# EAGLE board MAAV_Vehicle_13v1 (EAGLE 6.2)
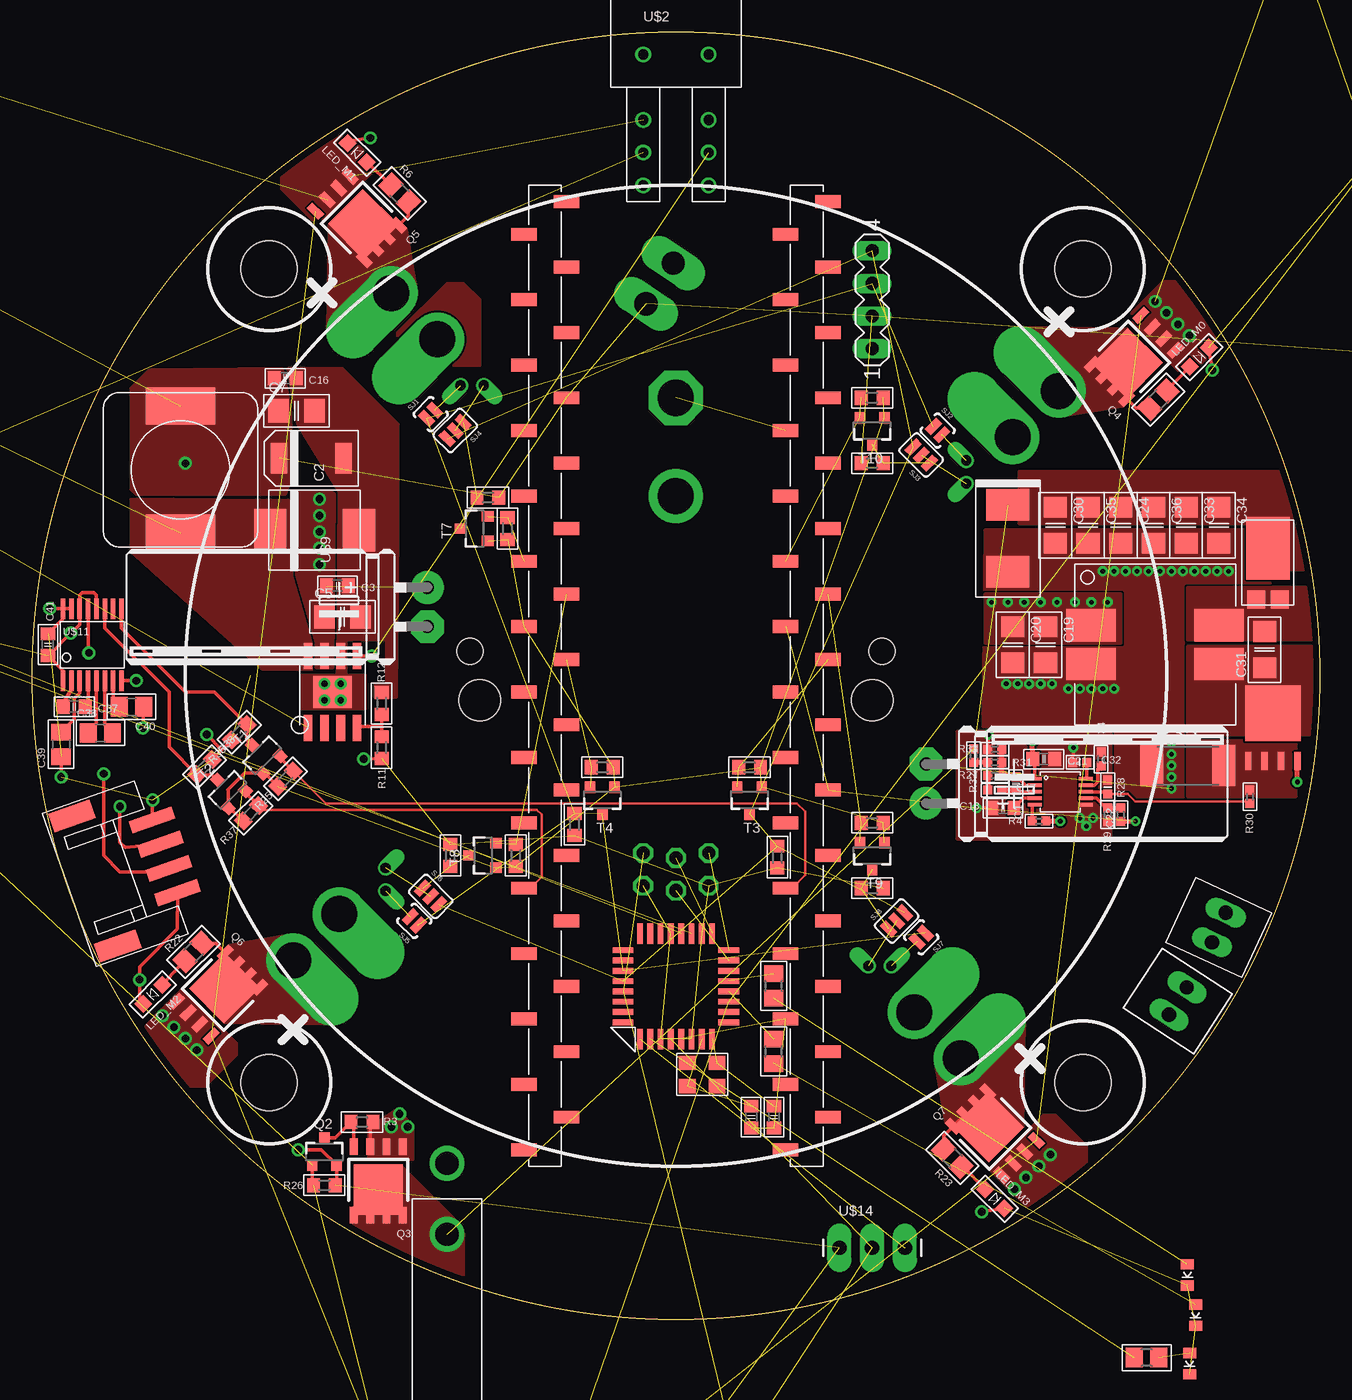
[diagram p0: board, top side]
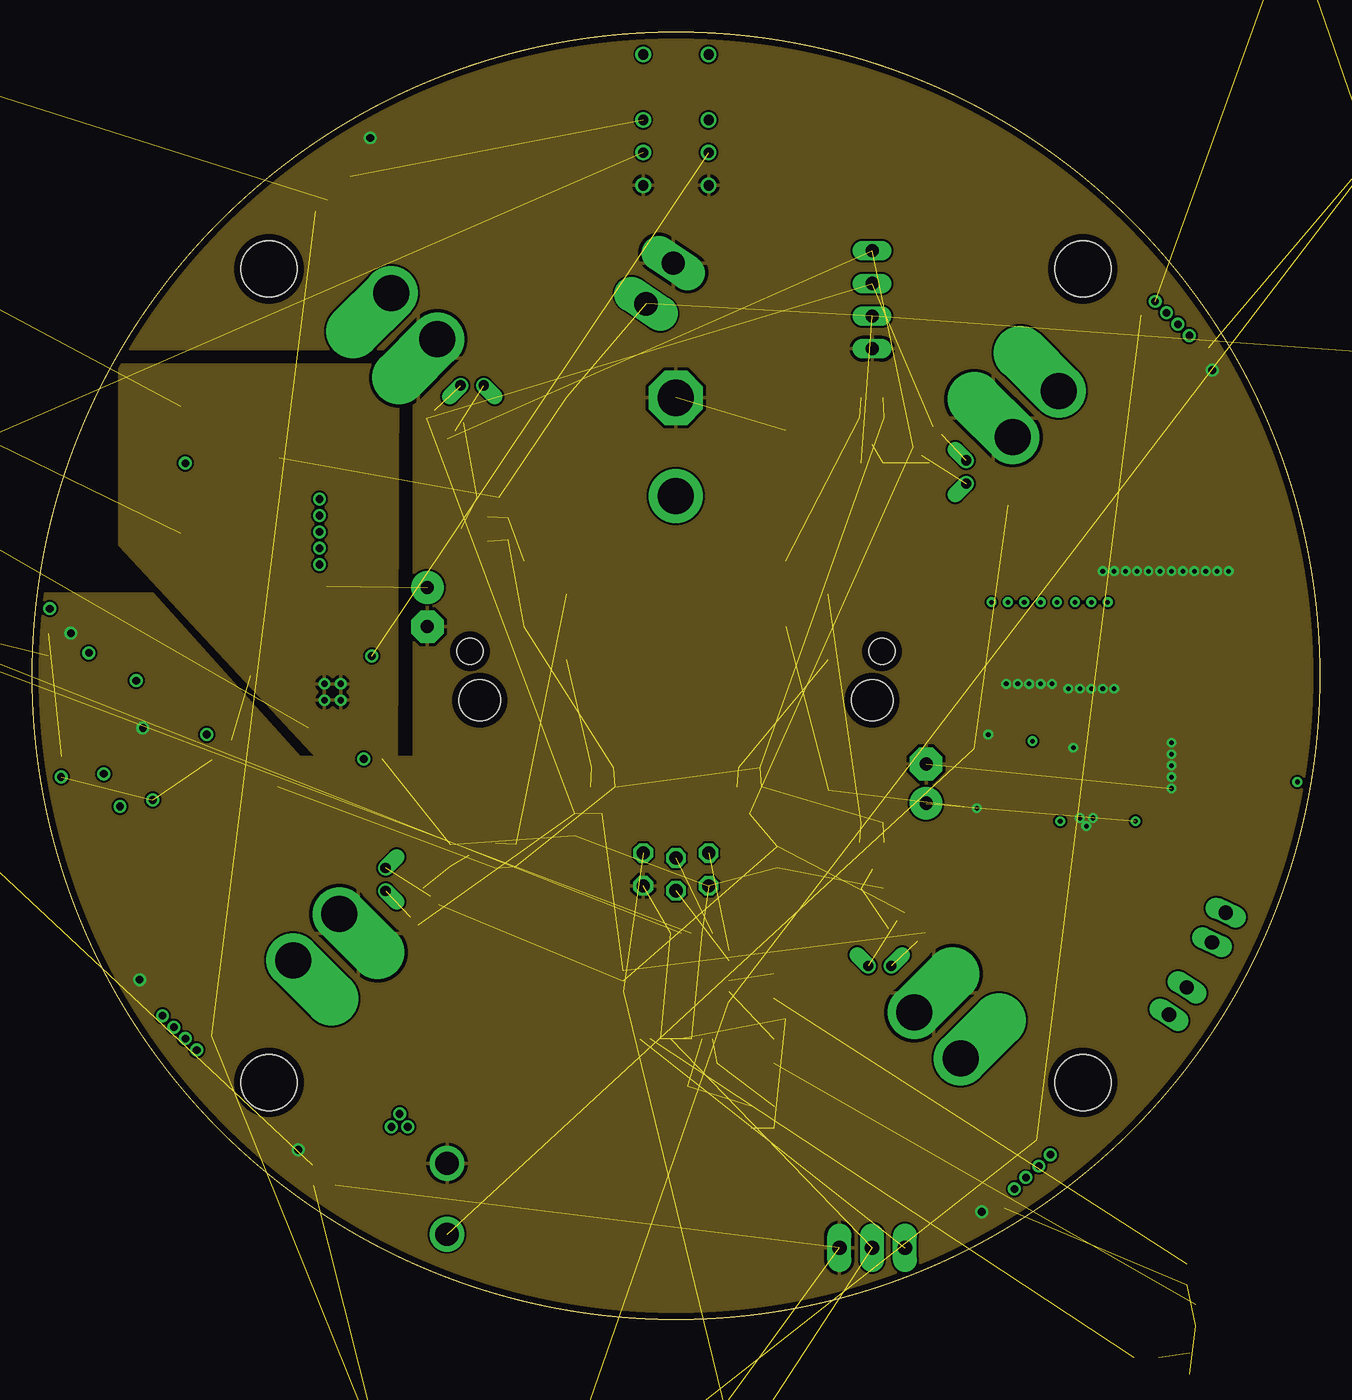
[diagram p1: board, inner layer Route2]
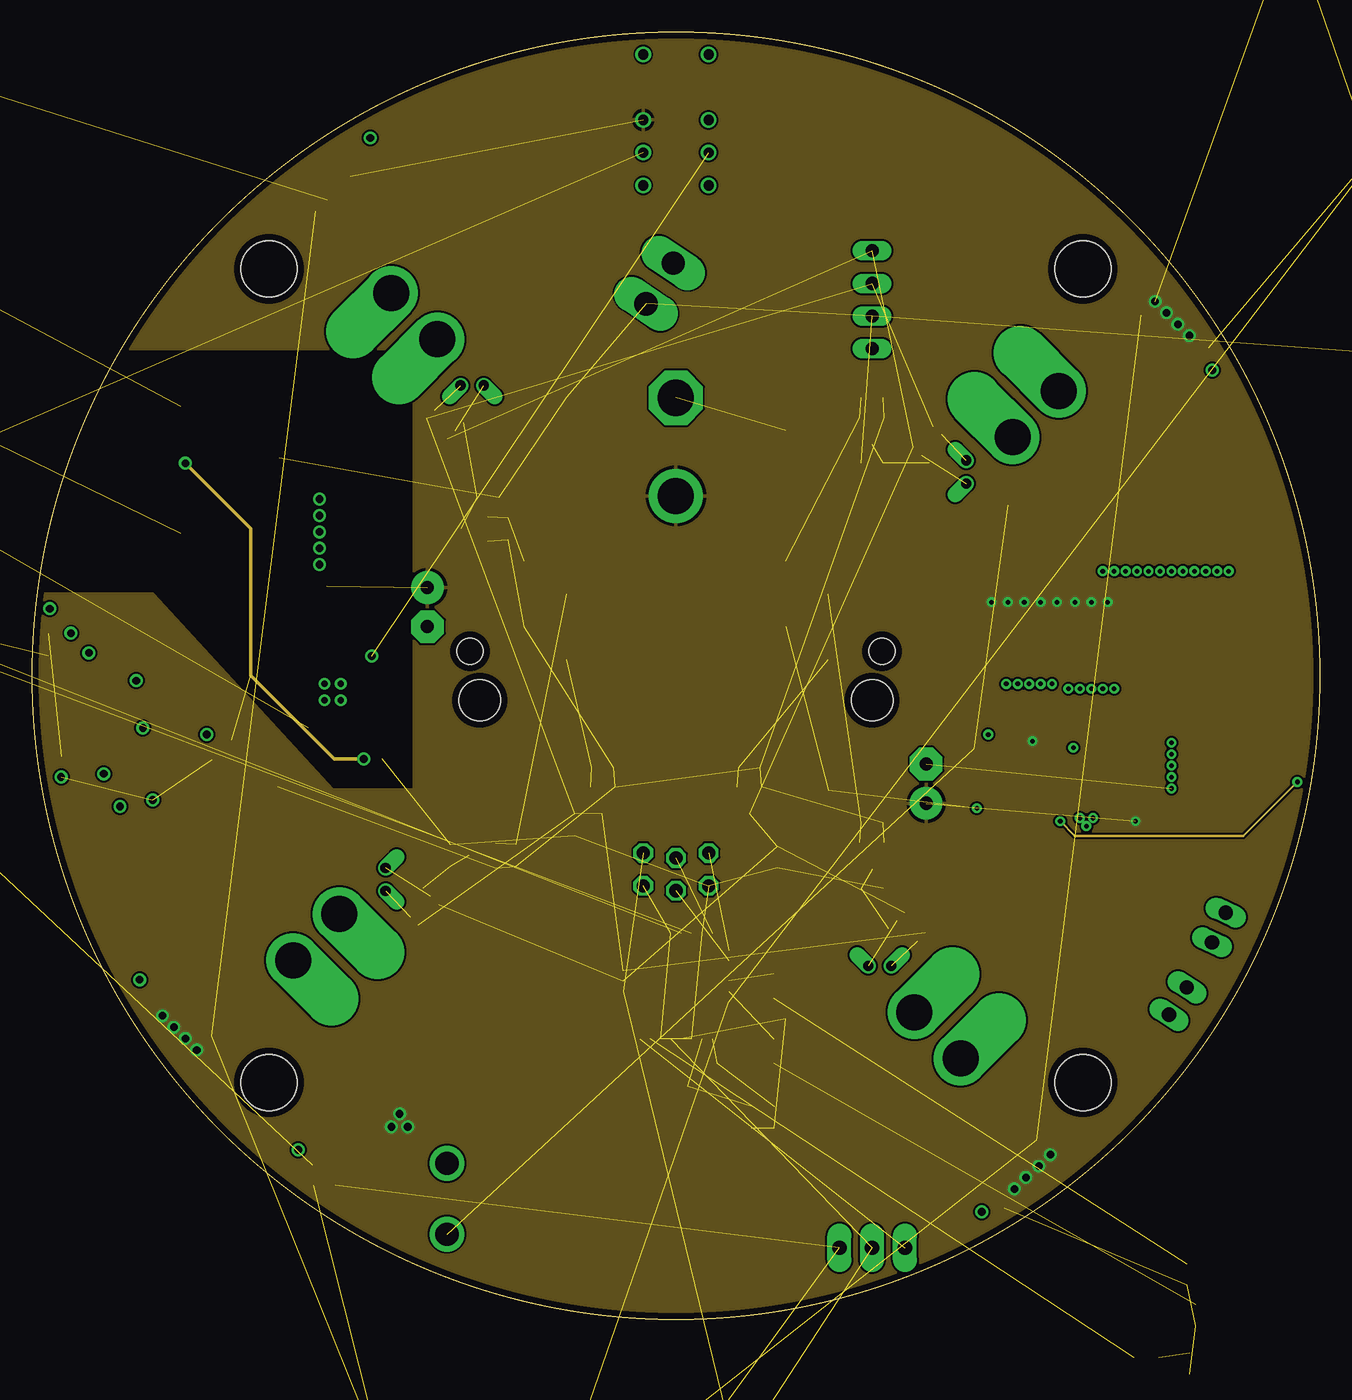
[diagram p2: board, inner layer Route15]
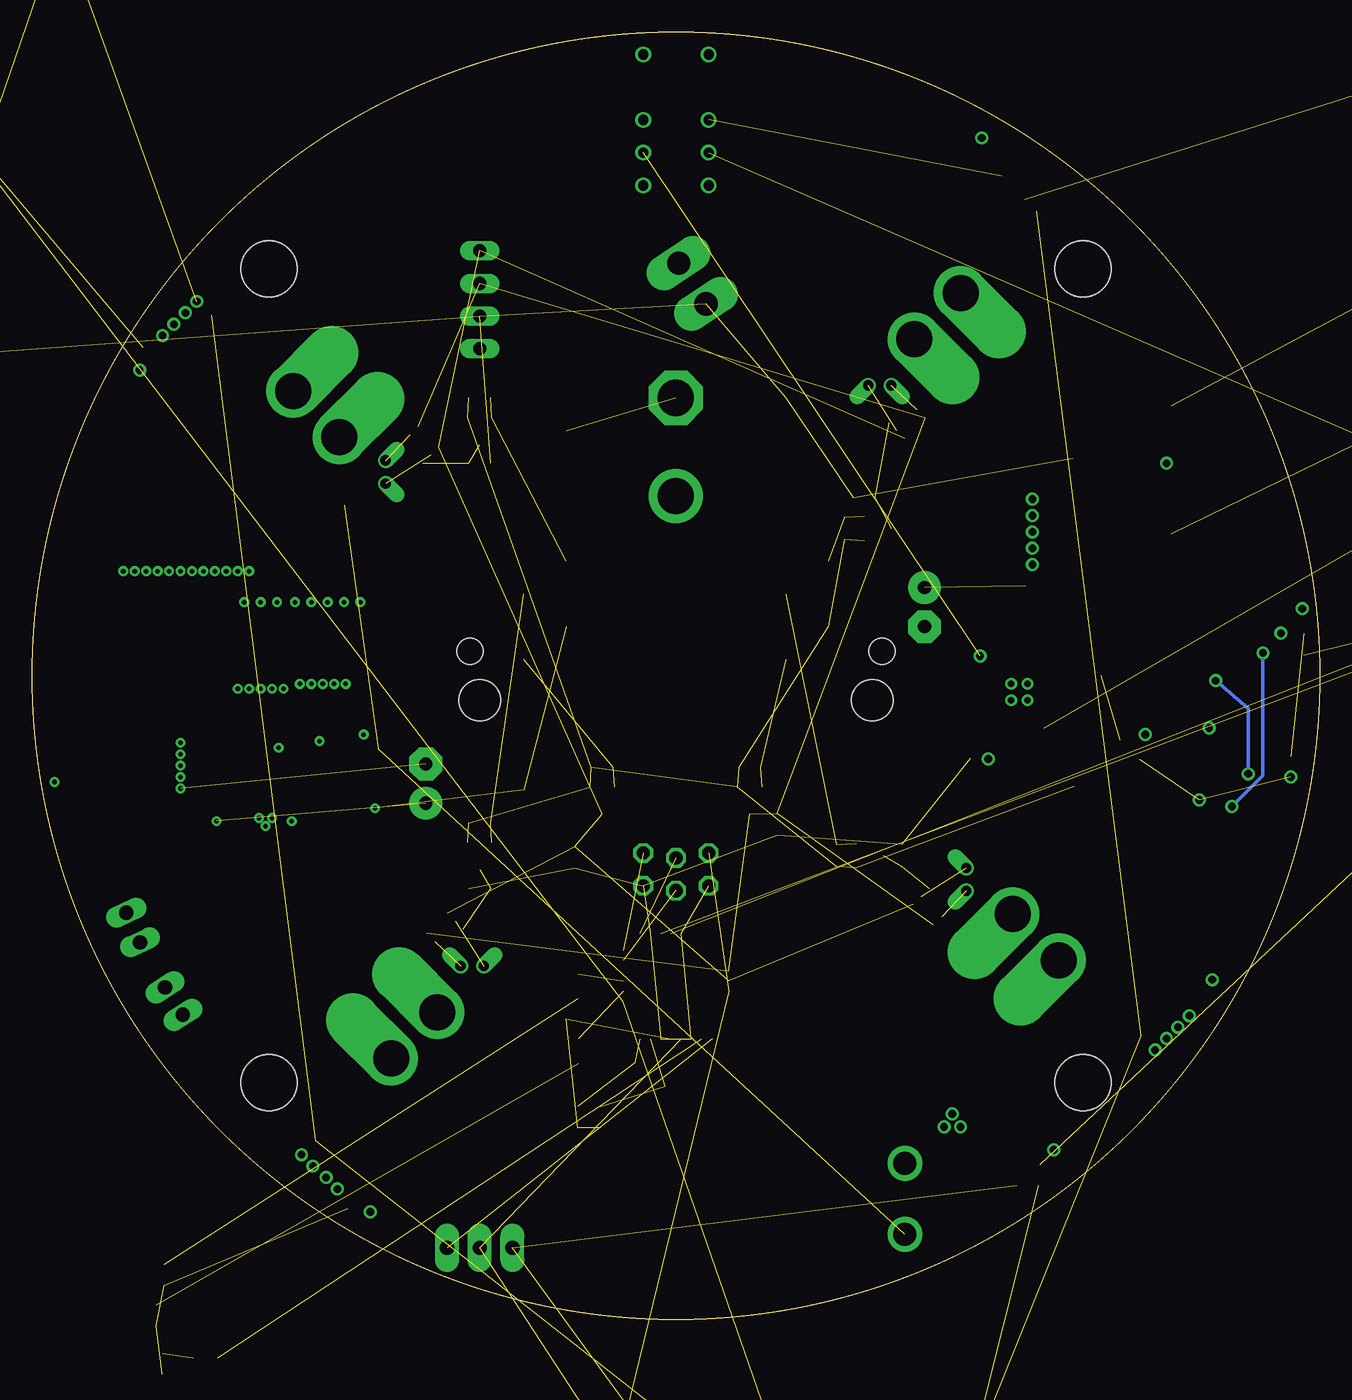
[diagram p3: board, bottom side, seen from below]

Size 100 x 100 mm. Coordinates in mm from the lower left corner, seen from the top.
Outline: circle at 50,50 radius 50
Copper layers (1+2*15+16): Top 0.0178mm / dielectric 12mil / Route2 0.0356mm / dielectric 28mil / Route15 0.0356mm / dielectric 12mil / Bottom 0.0178mm
Design rules: minimum track width 6mil, minimum drill 8mil, track to track 6mil, track to pad 6mil, pad to pad 6mil, via to via 6mil, smd to smd 6mil, copper to edge 20mil, drill to drill 16mil, minimum pad ring 8mil, minimum via ring 8mil, stop-mask expansion 3mil, vias tented up to drill 0mil, thermal gap 10mil
Holes 4.37 mm at 81.6,81.6 81.6,18.4 18.4,18.4 18.4,81.6

## Footprints (pad centres in the part's own frame; a part is rotated, then mirrored left to right if it is on the bottom)
C0402 = smd 0.7 x 0.7: 1 -0.533,0; 2 0.533,0
C_2917_POL = smd 1.3 x 2.4: A -2.5,0; C 2.5,0
C0603 = smd 1 x 1.1: 1 -0.85,0; 2 0.85,0
C1206 = smd 1.6 x 1.8: 1 -1.4,0; 2 1.4,0
C2917 = smd 2.45 x 3.35: + -2.6,0; - 2.6,0
EH22-9 = drill 1.016 pad 2.54: + 0,-1.524 | drill 1.016 pad 2.54 octagon: - 0,1.524
C0805 = smd 1.3 x 1.5: 1 -0.95,0; 2 0.95,0
PDS760 = smd 1.4 x 1.39: A1 -3.982,0.92; A2 -3.982,-0.92 | smd 4.86 x 3.36: C 0,0
PINTO_SMD = smd 2 x 1: P1 8.509,-36.83; P2 -11.811,-36.83; P3 11.811,-34.29; P4 -8.509,-34.29; P5 8.509,-31.75; P6 -11.811,-31.75; P7 11.811,-29.21; P8 -8.509,-29.21; P9 8.509,-26.67; P10 -11.811,-26.67; P11 11.811,-24.13; P12 -8.509,-24.13; P13 8.509,-21.59; P14 -11.811,-21.59; P15 11.811,-19.05; P16 -8.509,-19.05; P17 8.509,-16.51; P18 -11.811,-16.51; P19 11.811,-13.97; P20 -8.509,-13.97; P21 8.509,-11.43; P22 -11.811,-11.43; P23 11.811,-8.89; P24 -8.509,-8.89; P25 8.509,-6.35; P26 -11.811,-6.35; P27 11.811,-3.81; P28 -8.509,-3.81; P29 8.509,-1.27; P30 -11.811,-1.27; P31 11.811,1.27; P32 -8.509,1.27; P33 8.509,3.81; P34 -11.811,3.81; P35 11.811,6.35; P36 -8.509,6.35; P37 8.509,8.89; P38 -11.811,8.89; P39 11.811,11.43; P40 -8.509,11.43; P41 8.509,13.97; P42 -11.811,13.97; P43 11.811,16.51; P44 -8.509,16.51; P45 8.509,19.05; P46 -11.811,19.05; P47 11.811,21.59; P48 -8.509,21.59; P49 8.509,24.13; P50 -11.811,24.13; P51 11.811,26.67; P52 -8.509,26.67; P53 8.509,29.21; P54 -11.811,29.21; P55 11.811,31.75; P56 -8.509,31.75; P57 8.509,34.29; P58 -11.811,34.29; P59 11.811,36.83; P60 -8.509,36.83
MA03-2 = drill 1.016 octagon: P$1 -2.54,-1.46; P$2 0,-1.079; P$3 2.54,-1.46; P$4 2.54,1.079; P$5 0,1.46; P$6 -2.54,1.079
MA-04-SMD = smd 3.5 x 1: 1 2.875,3; 2 2.875,1; 3 2.875,-1; 4 2.875,-3 | smd 3.4 x 1.5: P$1 -2.875,-5.35; P$2 -2.875,5.35
POWER_CONN = drill 1.8: P1 2.75,0; P2 -2.75,0
DRQ125 = smd 3.85 x 2.5: 1 -4.975,1.5; 2 -4.975,-1.5; 3 4.975,-1.5; 4 4.975,1.5
CHIPLED_0603 = smd 0.8 x 1: A -0.825,0; C 0.825,0
CHIPLED_0805 = smd 1 x 1: A 0,-1.05; C 0,1.05
4-SMD_DFN = smd 1.3 x 1.1: GND1 1.15,-0.9; GND2 -1.15,0.9; X1 -1.15,-0.9; X2 1.15,0.9
SOT23-3 = smd 0.8 x 0.9: 1 -0.95,-1; 2 0.95,-1; 3 0,1.1
SO-8_POWER-PAK = smd 0.61 x 1.27: D1 -1.905,2.67; D2 -0.635,2.67; D3 0.635,2.67; D4 1.905,2.67; G 1.905,-2.67; S1 -1.905,-2.67; S2 -0.635,-2.67; S3 0.635,-2.67 | smd 3.81 x 3.91: D5 0,0.69
POWERFLAT-8 = smd 0.495 x 1.4: P$1 -1.905,-1.55; P$2 -0.635,-1.55; P$3 0.635,-1.55; P$4 1.905,-1.55 | smd 4.305 x 4.3: P$5 0,2.152
R0603 = smd 1 x 1.1: 1 -0.85,0; 2 0.85,0
R0402 = smd 0.7 x 0.7: 1 -0.533,0; 2 0.533,0
R0805 = smd 1.3 x 1.5: 1 -0.95,0; 2 0.95,0
R2512 = smd 1.8 x 3.2: 1 -2.8,0; 2 2.8,0
SWITCH-OFF-MOM = smd 1.45 x 1: P$1 2.575,0.85; P$2 2.575,-0.85; P$3 -2.575,0.85; P$4 -2.575,-0.85
SJ_2S-NO = smd 0.635 x 1.27: 1 -0.45,0; 2 0.45,0
SJ_3 = smd 0.635 x 1.27: 1 -0.889,0; 2 0,0; 3 0.889,0
MA04-1 = drill 1.016 long: 1 -3.81,0; 2 -1.27,0; 3 1.27,0; 4 3.81,0
MSOP-10 = smd 0.27 x 1.075: P$1 -1,-1.988; P$2 -0.5,-1.988; P$3 0,-1.988; P$4 0.5,-1.988; P$5 1,-1.988; P$6 1,1.988; P$7 0.5,1.988; P$8 0,1.988; P$9 -0.5,1.988; P$10 -1,1.988
TPS5450 = smd 2.032 x 0.66: P$1 -2.794,1.905; P$2 -2.794,0.635; P$3 -2.794,-0.635; P$4 -2.794,-1.905; P$5 2.794,-1.905; P$6 2.794,-0.635; P$7 2.794,0.635; P$8 2.794,1.905 | smd 2.49 x 2.99: P$9 0,0 | drill 0.5: P$10 0.635,0.635; P$11 0.635,-0.635; P$12 -0.635,-0.635; P$13 -0.635,0.635
32-TQFP = smd 1.6 x 0.45: P$1 -4.1,2.8; P$2 -4.1,2; P$3 -4.1,1.2; P$4 -4.1,0.4; P$5 -4.1,-0.4; P$6 -4.1,-1.2; P$7 -4.1,-2; P$8 -4.1,-2.8; P$17 4.1,-2.8; P$18 4.1,-2; P$19 4.1,-1.2; P$20 4.1,-0.4; P$21 4.1,0.4; P$22 4.1,1.2; P$23 4.1,2; P$24 4.1,2.8 | smd 0.45 x 1.6: P$9 -2.8,-4.1; P$10 -2,-4.1; P$11 -1.2,-4.1; P$12 -0.4,-4.1; P$13 0.4,-4.1; P$14 1.2,-4.1; P$15 2,-4.1; P$16 2.8,-4.1; P$25 2.8,4.1; P$26 2,4.1; P$27 1.2,4.1; P$28 0.4,4.1; P$29 -0.4,4.1; P$30 -1.2,4.1; P$31 -2,4.1; P$32 -2.8,4.1
8-SOIC = smd 2 x 0.6: P$1 -2.4,1.905; P$2 -2.4,0.635; P$3 -2.4,-0.635; P$4 -2.4,-1.905; P$5 2.4,-1.905; P$6 2.4,-0.635; P$7 2.4,0.635; P$8 2.4,1.905
CDRH127 = smd 2.9 x 5.4: P1 -4.95,0; P2 4.95,0
SWITCH_VERT_DPDT = drill 0.8: G1 -2.54,2.54; G2 -2.54,-2.54; P$1 7.62,-2.54; P$2 5.08,-2.54; P$3 2.54,-2.54; P$4 7.62,2.54; P$5 5.08,2.54; P$6 2.54,2.54
ESC_CONN = drill 2.8 offset: BATT 2.54,0; GND -2.54,0 | drill 0.8 offset: SCL/C- -7.62,0; SDA/C+ -6.35,1.27
IMU = hole 3.226: -15.24,-1.905; 15.24,-1.905 | hole 2.032: -16.002,1.905; 16.002,1.905
LIPO_POWER = drill 2.8 octagon: GND 3.81,0 | drill 2.8: V_BATT -3.81,0
DO-214AB,SMC = smd 2.5 x 3.3: A 3.45,0; C -3.45,0
SCREW_TERM_2POS = drill 1.1 long: P$1 -1.27,0; P$2 1.27,0
16-TSSOP = smd 0.35 x 1.6: P$1 -2.275,-2.8; P$2 -1.625,-2.8; P$3 -0.975,-2.8; P$4 -0.325,-2.8; P$5 0.325,-2.8; P$6 0.975,-2.8; P$7 1.625,-2.8; P$8 2.275,-2.8; P$9 2.275,2.8; P$10 1.625,2.8; P$11 0.975,2.8; P$12 0.325,2.8; P$13 -0.325,2.8; P$14 -0.975,2.8; P$15 -1.625,2.8; P$16 -2.275,2.8
POWER_HOLES = drill 1.8 long: P$1 -1.905,0; P$2 1.905,0
1X03_LONGPADS = drill 1.118 pad 1.88 long: 1 0,0; 2 2.54,0; 3 5.08,0

## Placement (x,y rotation side)
C1  33pF  [C0402]  76.42,41.62 90 top
C2  330uF  [C_2917_POL]  21.68,66.89 0 top
C3  0.01uF  [C0603]  23.71,56.98 0 top
C4  4.7uF  [C1206]  -55.41,112.23 0 top  (outside the outline)
C5  4.7uF  [C1206]  24.09,54.57 0 top
C6  0.01uF  [C0603]  -74.46,102.07 90 top  (outside the outline)
C7  10uF  [C1206]  20.54,70.57 0 top
C8  10uF  [C1206]  152.24,74.21 90 top  (outside the outline)
C9  10uF  [C1206]  144.62,73.5 90 top  (outside the outline)
C10  100nF  [C0603]  44.46,-28.74 90 top  (outside the outline)
C11  100nF  [C0603]  57.62,-30.01 36.2 top  (outside the outline)
C12  100nF  [C0603]  -24.93,58.89 270 top  (outside the outline)
C13  100nF  [C0603]  42.38,-28.74 90 top  (outside the outline)
C14  22pF  [C0603]  57.62,15.71 90 top
C15  22pF  [C0603]  55.84,15.71 90 top
C16  0.01uF  [C0603]  19.65,73.11 0 top
C17  4700pf  [C0402]  74.77,41.11 180 top
C18  1uF  [C0603]  75.4,39.71 180 top
C19  10uF  [C1206]  78.7,52.41 270 top
C20  10uF  [C1206]  76.16,52.41 270 top
C21  0.1uF  [C0603]  78.58,43.52 0 top
C22  270pF  [C0402]  83.53,41.36 90 top
C23  150uF  [C2917]  75.78,60.67 270 top
C24  22uF  [C1206]  84.54,61.68 270 top
C25  10uF  [C1206]  98.26,108.42 270 top  (outside the outline)
C26  10uF  [C1206]  -64.3,112.23 180 top  (outside the outline)
C27  100nF  [C0603]  -64.3,114.77 180 top  (outside the outline)
C28  680uF  [EH22-9]  69.43,41.62 0 top
C29  680uF  [EH22-9]  30.7,55.33 180 top
C30  22uF  [C1206]  79.46,61.68 270 top
C31  10uF  [C1206]  95.72,52.03 90 top
C32  0.1uF  [C0402]  81.37,43.27 180 top
C33  22uF  [C1206]  89.62,61.68 270 top
C34  22uF  [C1206]  92.16,61.68 270 top
C35  22uF  [C1206]  82,61.68 270 top
C36  22uF  [C1206]  87.08,61.68 270 top
C37  0.1uF  [C0603]  3.26,47.59 0 top
C38  0.47uF  [C0805]  5.3,45.55 0 top
C39  0.47uF  [C0805]  2.25,44.67 90 top
C40  0.47uF  [C0805]  7.71,47.59 180 top
C41  0.1uF  [C0603]  1.23,52.41 90 top
D1  PDS760  [PDS760]  95.97,59.91 90 top
IC3  PINTO_SMD  [PINTO_SMD]  50,50 0 top
J1  MA03-2  [MA03-2]  50,34.76 180 top
J7  MA04-1  [MA-04-SMD]  7.58,35.01 19.4 top
J9  POWER_CONN  [POWER_CONN]  32.22,9.36 270 top
L2  10uH  [DRQ125]  87.21,52.41 0 top
LED1  GREEN  [CHIPLED_0603]  89.89,-3.45 270 top
LED2  GREEN  [CHIPLED_0603]  90.36,0.32 270 top
LED3  GREEN  [CHIPLED_0603]  89.72,3.45 270 top
LED_M0  GREEN  [CHIPLED_0805]  90.64,74.77 315 top
LED_M1  GREEN  [CHIPLED_0805]  25.23,90.64 45 top
LED_M2  GREEN  [CHIPLED_0805]  9.36,25.23 135 top
LED_M3  GREEN  [CHIPLED_0805]  74.77,9.36 225 top
Q1  CRYSTAL_16MHZ_SMD  [4-SMD_DFN]  52.03,19.01 0 top
Q2  MOSFET-NCHANNELSMD  [SOT23-3]  22.7,12.99 0 top
Q3  P-MOSFET-SO8POWER-PAK  [SO-8_POWER-PAK]  26.89,10.76 180 top
Q4  P-MOSFET-SO8POWER-PAK  [SO-8_POWER-PAK]  85.56,74.77 135 top
Q5  P-MOSFET-SO8POWER-PAK  [SO-8_POWER-PAK]  25.23,85.56 225 top
Q6  P-MOSFET-SO8POWER-PAK  [SO-8_POWER-PAK]  14.44,25.23 315 top
Q7  P-MOSFET-SO8POWER-PAK  [SO-8_POWER-PAK]  74.77,14.44 45 top
Q8  STL60N3LLH5  [POWERFLAT-8]  96.35,44.92 0 top
R1  10k  [R0603]  55.72,42.89 0 top
R2  10k  [R0603]  57.87,35.9 270 top
R3  10k  [R0603]  25.62,15.33 0 top
R4  [R0402]  78.19,38.7 0 top
R5  1k  [R0603]  35.94,-34.87 135 top  (outside the outline)
R6  330  [R0805]  28.54,87.47 315 top
R7  10k  [R0603]  62.7,-40.17 0 top  (outside the outline)
R8  1k  [R0603]  30.95,-22.39 180 top  (outside the outline)
R9  10k  [R0603]  44.28,42.89 0 top
R10  10k  [R0603]  42.13,38.44 270 top
R11  10k  [R0603]  27.14,44.41 270 top
R12  3.16k  [R0603]  27.14,47.84 90 top
R13  10k  [R0603]  36.92,61.43 270 top
R14  4.7k  [R0603]  35.39,63.84 0 top
R15  10k  [R0603]  37.55,36.03 270 top
R16  4.7k  [R0603]  32.47,36.03 90 top
R17  10k  [R0603]  65.24,38.57 0 top
R18  4.7k  [R0603]  65.24,33.49 0 top
R19  10k  [R0603]  65.24,71.59 0 top
R20  4.7k  [R0603]  65.24,66.51 180 top
R21  10k  [R0603]  104.61,90.95 45 top  (outside the outline)
R22  330  [R0805]  12.53,28.54 45 top
R23  330  [R0805]  71.46,12.53 135 top
R24  330  [R0805]  87.47,71.46 225 top
R25  10k  [R0603]  19.67,42.01 225 top
R26  10k  [R0603]  22.7,10.41 180 top
R27  20k  [R0402]  74.77,42.25 0 top
R28  64.9k  [R0402]  84.54,39.2 270 top
R29  10k  [R0402]  83.53,39.2 90 top
R30  1k  [R0402]  94.58,40.6 90 top
R31  20k  [R0402]  74.77,43.27 180 top
R32  50  [R0402]  73.11,43.78 90 top
R33  2.32k  [R0402]  74.77,44.28 0 top
R34  27.4k  [R0402]  83.02,43.52 270 top
R35  0.05  [R2512]  89.75,43.02 0 top
R36  10k  [R0603]  16.08,45.6 225 top
R37  10k  [R0603]  16.98,39.31 225 top
R38  10k  [R0603]  13.39,42.91 45 top
R44  240  [R0805]  86.55,-2.98 180 top
R47  240  [R0805]  57.59,20.82 90 top
R48  240  [R0805]  57.6,25.9 90 top
R51  10k  [R0603]  -27.47,58.89 270 top  (outside the outline)
R52  4.7k  [R0603]  -30.01,58.89 90 top  (outside the outline)
S2  SWITCH-OFF-MOM  [SWITCH-OFF-MOM]  62.7,-45.25 90 top  (outside the outline)
SJ1  SOLDERJUMPERNO  [SJ_2S-NO]  30.95,70.32 45 top
SJ2  SOLDERJUMPERNO  [SJ_2S-NO]  70.32,69.05 315 top
SJ3  SOLDERJUMPER_2WAYS  [SJ_3]  69.05,67.14 135 top
SJ4  SOLDERJUMPER_2WAYS  [SJ_3]  32.86,69.05 225 top
SJ5  SOLDERJUMPERNO  [SJ_2S-NO]  29.68,30.95 135 top
SJ6  SOLDERJUMPER_2WAYS  [SJ_3]  30.95,32.86 315 top
SJ7  SOLDERJUMPERNO  [SJ_2S-NO]  69.05,29.68 225 top
SJ8  SOLDERJUMPER_2WAYS  [SJ_3]  67.14,30.95 45 top
SV1  [MA04-1]  65.24,79.21 90 top
T1  MOSFET-NCHANNELSMD  [SOT23-3]  17.88,43.8 45 top
T2  MOSFET-NCHANNELSMD  [SOT23-3]  15.18,41.11 45 top
T3  MOSFET-NCHANNELSMD  [SOT23-3]  55.72,40.35 180 top
T4  MOSFET-NCHANNELSMD  [SOT23-3]  44.28,40.35 180 top
T7  MOSFET-NCHANNELSMD  [SOT23-3]  34.38,61.43 90 top
T8  MOSFET-NCHANNELSMD  [SOT23-3]  35.01,36.03 90 top
T9  MOSFET-NCHANNELSMD  [SOT23-3]  65.24,36.03 180 top
T10  MOSFET-NCHANNELSMD  [SOT23-3]  65.24,69.05 180 top
T11  MOSFET-NCHANNELSMD  [SOT23-3]  36.03,-28.74 5 top  (outside the outline)
U1  LM5022  [MSOP-10]  79.84,40.98 270 top
U2  TPS5450  [TPS5450]  23.33,48.73 90 top
U3  ATMEGA328-AU  [32-TQFP]  50,25.87 90 top
U4  REG_3V_8SOIC  [8-SOIC]  148.43,73.5 270 top  (outside the outline)
U$1  INDUCTOR  [CDRH127]  11.52,66 90 top
U$2  SWITCH_DPDT  [SWITCH_VERT_DPDT]  50,95.72 270 top
U$3  ESC_CONN  [ESC_CONN]  77.94,70.32 45 top
U$4  ESC_CONN  [ESC_CONN]  29.68,77.94 135 top
U$5  ESC_CONN  [ESC_CONN]  22.06,29.68 225 top
U$6  ESC_CONN  [ESC_CONN]  70.32,22.06 315 top
U$7  IMU  [IMU]  50,50 0 bottom
U$8  LIPO_POWER  [LIPO_POWER]  50,67.78 90 top
U$9  DIODE-SCHOTTKYBIG  [DO-214AB,SMC]  21.93,61.3 0 top
U$10  M02_SCREW_0.1  [SCREW_TERM_2POS]  92.16,30.44 65.1 top
U$11  MAX3221-RS232  [16-TSSOP]  4.66,52.41 0 top
U$12  POWER_HOLES  [POWER_HOLES]  48.73,80.48 56.3 top
U$13  M02_SCREW_0.1  [SCREW_TERM_2POS]  88.99,24.73 57 top
U$14  SERVO_JACK_VERT  [1X03_LONGPADS]  62.7,5.55 0 top

## Library data of the parts
C1 C17 C18 C21 C22 C32 LED_M0 LED_M1-LED_M3 Q2 R4 R27-R34 SJ1-SJ8 U$3-U$6 U$9 U$14 = Jon_LIB
C2 = Jon_LIB; DIGIKEY: 478-1811-1-ND
C3 C6 C16 = Jon_LIB; DIGIKEY: 478-1601-1-ND
C4 C5 = Jon_LIB; DIGIKEY: 399-5777-1-ND
C7 C25 = Jon_LIB; DIGIKEY: 445-1597-1-ND
C8 = Jon_LIB; DIGIKEY: 490-1746-1-ND
C9 C26 = Jon_LIB; DIGIKEY: 445-4112-1-ND
C10-C13 C27 = Jon_LIB; DIGIKEY: 478-1239-1-ND
C14 C15 = Jon_LIB; DIGIKEY: 478-6200-1-ND
C19 C20 C31 = Jon_LIB; PARTNUM: 445-5998-1-ND
C23 = maav_personal; PARTNUM: 399-4663-1-ND
C24 C30 C33-C36 = Jon_LIB; DIGIKEY#: 587-1433-1-ND
C28 C29 = MAAV; DIGIKEY: P12378-ND
C37 C41 = Jon_LIB; DIGIKEY#: 478-1239-1-ND
C38-C40 = Jon_LIB; DIGIKEY#: 1276-2966-1-ND
D1 = maav_personal
IC3 = Jon_LIB; DIGIKEY: S5641-ND (6); DIGIKEY_ASSOC: S9218-ND (2)
J1 U$7 U$8 U$12 = MAAV
J7 = Jon_LIB; DIGIKEY#: 455-1751-1-ND
J9 = MAAV; DIGIKEY: A30614-ND
L2 = maav_personal; PARTNUM: 513-1289-1-ND
LED1-LED3 = Jon_LIB; DIGIKEY: 1080-1405-1-ND
Q1 = Jon_LIB; DIGIKEY#: XC1137CT-ND
Q3-Q7 = Jon_LIB; DIGIKEY#: SI7135DP-T1-GE3CT-ND
Q8 = maav_personal; PARTNUM: 497-11094-1-ND
R1 R2 R7 R9 R10 R13-R20 R25 R36-R38 = Jon_LIB; DIGIKEY: P10KGCT-ND; DIGIKEY#: PXXXGCT-ND
R3 R26 = Jon_LIB; DIGIKEY#: PXXXGCT-ND
R5 R8 R21 = Jon_LIB; DIGIKEY: P10KACT-ND; DIGIKEY#: PXXXGCT-ND
R6 R22-R24 = Jon_LIB; DIGIKEY: P330ADCT-ND
R11 = Jon_LIB; DIGIKEY: P10KDBCT-ND; DIGIKEY#: PXXXGCT-ND
R12 = Jon_LIB; DIGIKEY: 311-3.16KDCT-ND; DIGIKEY#: PXXXGCT-ND
R35 = rcl
R44 R47 R48 = Jon_LIB; DIGIKEY: P240GCT-ND
R51 = Jon_LIB; DIGIKEY: P240GCT-ND; DIGIKEY#: PXXXGCT-ND
R52 = Jon_LIB; DIGIKEY: P4.7KGCT-ND; DIGIKEY#: PXXXGCT-ND
S2 = p498; DIGIKEY: P11084SCT-ND
SV1 = con-lstb; OC_FARNELL: unknown; OC_NEWARK: unknown
T1-T4 T7-T11 = Jon_LIB; DIGIKEY: BSS138KCT-ND
U1 = maav_personal; PARTNUM: LM5022MM/NOPBCT-ND
U2 = MAAV; DIGIKEY: 296-23750-1-ND
U3 = MAAV; DIGIKEY: ATMEGA328-AU-ND
U4 = MAAV; DIGIKEY: 296-2719-5-ND
U$1 = Jon_LIB; DIGIKEY: 308-1333-1-ND
U$2 = Jon_LIB; DIGIKEY#: AS22AV-ND
U$10 U$13 = Jon_LIB; DIGIKEY#: A98333-ND
U$11 = Jon_LIB; DIGIKEY#: 296-19825-1-ND

## Nets
+1V8: IC3.P34 R1.2 R9.2 R13.2 R15.2 R17.2 R19.2 R25.2 R37.2 T1.1 T2.1 T3.1 T4.1 T7.1 T8.1 T9.1 T10.1
+3V3: C8.1 U4.P$7 U4.P$8
+5V: C2.A C7.1 C9.1 C10.1 C11.1 C13.1 C16.1 C26.2 C27.2 C39.1 C41.2 IC3.P48 J1.P$6 J7.1 R2.2 R7.2 R10.2 R11.2 R14.2 R16.2 R18.2 R20.2 R36.2 R38.2 SV1.2 U3.P$4 U3.P$6 U3.P$18 U4.P$5 U4.P$6 U$1.P2 U$11.P$15 U$11.P$16 U$12.P$1 U$14.2
+12V: C23.+ C24.1 C30.1 C33.1 C34.1 C35.1 C36.1 D1.C J9.P1 Q3.D1 Q3.D2 Q3.D3 Q3.D4 Q3.D5 R32.2
BATT_SENSE: R51.1 R52.2 U3.P$19
COMP: C1.1 C17.1 U1.P$3
CS: C22.1 R30.1 U1.P$8
ENABLE: Q2.1 R8.2 R26.2 R51.2 U$2.P$2
FB2: C1.2 R27.2 R31.1 R33.2 U1.P$2
GND: C2.C C3.2 C4.2 C5.2 C7.2 C8.2 C9.2 C10.2 C11.2 C12.2 C13.2 C14.1 C15.1 C16.2 C18.2 C19.2 C20.2 C21.2 C22.2 C23.- C24.2 C25.2 C26.1 C27.1 C28.- C29.- C30.2 C32.2 C33.2 C34.2 C35.2 C36.2 C40.1 C41.1 IC3.P9 IC3.P23 IC3.P33 IC3.P45 J1.P$4 J7.4 J9.P2 L2.2 LED1.C LED2.C LED3.C LED_M0.C LED_M1.C LED_M2.C LED_M3.C Q2.2 R12.2 R21.1 R26.1 R29.1 R33.1 R34.1 R35.1 R52.1 S2.P$2 S2.P$4 SV1.1 T11.2 U1.P$6 U2.P$6 U2.P$9 U2.P$10 U2.P$11 U2.P$12 U2.P$13 U3.P$3 U3.P$5 U3.P$21 U4.P$3 U4.P$4 U$2.P$1 U$2.P$4 U$3.GND U$4.GND U$5.GND U$6.GND U$8.GND U$9.A U$11.P$1 U$11.P$12 U$11.P$14 U$12.P$2 U$14.1
LED1: R48.2 U3.P$13
LED2: R47.2 U3.P$12
LED3: R44.2 U3.P$2
MISO: J1.P$1 U3.P$16
MOSI: J1.P$5 U3.P$15
MOTOR0_PWM_1V8: IC3.P37 R19.1 T10.2
MOTOR1_PWM_1V8: IC3.P38 R13.1 T7.2
MOTOR2_PWM_1V8: IC3.P36 R15.1 T8.2
MOTOR3_PWM_1V8: IC3.P35 R17.1 T9.2
MOTOR_ENABLE: Q4.G Q5.G Q6.G Q7.G R5.2 R8.1
MOTOR_LOGIC: R21.2 T11.1 U3.P$11
N$1: C37.1 U$11.P$2
N$2: LED1.A R44.1
N$3: C12.1 U3.P$20
N$4: R11.1 R12.1 U2.P$4
N$5: Q4.D1 Q4.D2 Q4.D3 Q4.D4 Q4.D5 R24.2 U$3.BATT
N$6: C14.2 Q1.X2 U3.P$8
N$7: R5.1 T11.3
N$8: C15.2 Q1.X1 U3.P$7
N$9: C6.1 U2.P$1
N$10: SJ2.2 U$3.SDA/C+
N$11: U2.P$5 U$2.P$5
N$12: SJ3.2 U$3.SCL/C-
N$13: LED_M0.A R24.1
N$14: Q5.D1 Q5.D2 Q5.D3 Q5.D4 Q5.D5 R6.2 U$4.BATT
N$15: LED_M1.A R6.1
N$16: SJ1.2 U$4.SDA/C+
N$17: SJ4.2 U$4.SCL/C-
N$18: Q6.D1 Q6.D2 Q6.D3 Q6.D4 Q6.D5 R22.2 U$5.BATT
N$19: LED_M2.A R22.1
N$20: SJ5.2 U$5.SDA/C+
N$21: SJ6.2 U$5.SCL/C-
N$22: Q7.D1 Q7.D2 Q7.D3 Q7.D4 Q7.D5 R23.2 U$6.BATT
N$23: LED_M3.A R23.1
N$24: C17.2 R27.1
N$25: SJ7.2 U$6.SDA/C+
N$26: SJ8.2 U$6.SCL/C-
N$27: Q2.3 Q3.G R3.1
N$28: C6.2 U2.P$8 U$1.P1 U$9.C
N$29: Q8.P$4 R4.2
N$30: C31.2 D1.A1 D1.A2 L2.4
N$31: R31.2 R32.1
N$32: C37.2 U$11.P$4
N$33: LED2.A R47.1
N$34: LED3.A R48.1
N$35: C38.1 U$11.P$5
N$36: C38.2 U$11.P$6
N$37: C39.2 U$11.P$3
N$38: C40.2 U$11.P$7
OPT_SIG: U3.P$23
OUT: R4.1 U1.P$5
PWM_5V_M0: R20.1 SJ3.1 T10.3
PWM_5V_M1: R14.1 SJ4.1 T7.3
PWM_5V_M2: R16.1 SJ6.1 T8.3
PWM_5V_M3: R18.1 SJ8.1 T9.3
Q3_D: C31.1 L2.3 Q8.P$5
Q3_S: Q8.P$1 Q8.P$2 Q8.P$3 R30.2 R35.2
RESET: J1.P$3 R7.1 S2.P$1 S2.P$3 U3.P$29
RS-232_RX1: J7.3 U$11.P$8
RS-232_TX1: J7.2 U$11.P$13
RT: R34.2 U1.P$9
RX1_1V8: IC3.P17 R25.1 T1.2
RX1_5V: R36.1 T1.3 U$11.P$9
SCK: J1.P$2 U3.P$17
SCL_1V8: IC3.P31 R1.1 T3.2
SCL_5V: R2.1 SJ3.3 SJ4.3 SJ6.3 SJ8.3 SV1.4 T3.3 U3.P$28
SDA_1V8: IC3.P32 R9.1 T4.2
SDA_5V: R10.1 SJ1.1 SJ2.1 SJ5.1 SJ7.1 SV1.3 T4.3 U3.P$27
SERVO_1: U3.P$1 U$14.3
SS2: C32.1 U1.P$10
TX1_1V8: IC3.P18 R37.1 T2.2
TX1_5V: R38.1 T2.3 U$11.P$11
UVLO: R28.1 R29.2 U1.P$7
V_BATT: C3.1 C4.1 C5.1 C19.1 C20.1 C21.1 C25.1 C28.+ C29.+ L2.1 Q3.S1 Q3.S2 Q3.S3 Q4.S1 Q4.S2 Q4.S3 Q5.S1 Q5.S2 Q5.S3 Q6.S1 Q6.S2 Q6.S3 Q7.S1 Q7.S2 Q7.S3 R3.2 R28.2 U1.P$1 U2.P$7 U$2.P$3 U$8.V_BATT
VCC2: C18.1 U1.P$4

## Tracks (layer width: path | path; a pad name or v marks a point on that pad's centre or on a via)
+1V8  (13 unrouted)
  Top 0.254: R25.2 18.05,42.42 T1.1 16.5,42.42 15.18,41.11 15.22,41.08 T2.1 15.36,39.73 R37.2
+3V3
  pour Top (no thermals): 150.97,70.32 149.06,70.32 149.06,72.22 150.33,73.5 151.78,74.87 152.72,74.84 152.72,71.92
+5V  (via drill 0.6)  (25 unrouted)
  Top 0.254: R11.2 v25.74,43.52 | U$11.P$16 2.39,54.42 C41.2 | U$11.P$16 v1.37,55.21 v1.36,55.21 | U$11.P$15 U$11.P$16 | C39.1 v2.25,42.13 | R38.2 14.73,44.25 | 14.73,44.25 R36.2 | v13.55,45.43 | v13.55,45.43 14.73,44.25 | J7.1 v9.36,40.35
  Route15 0.254: v25.74,43.52 23.46,43.52 16.98,50 16.98,61.43 v11.9,66.51
  pour Top (no thermals): 143.98,72.86 143.98,72.22 145.88,70.32 147.79,70.32 147.79,72.22 146.52,73.5 144.62,73.5
  pour Top (rank 4, no thermals): 19.39,73.88 9.11,73.75 7.71,72.35 7.71,64.48 8.09,64.1 19.65,64.1 20.16,65.75 20.03,71.46
+12V  (2 unrouted)
  pour Top (rank 5, no thermals): 76.67,61.81 96.74,61.81 96.74,58.26 100.55,58.26 100.55,63.72 98.39,65.88 76.67,65.88
  pour Top (no thermals): 28.66,11.9 33.11,7.45 33.49,6.69 33.49,0.34 24.85,0.34 24.85,8.6
BATT_SENSE  (2 unrouted)
COMP
  Top 0.254: U1.P$3 76.52,40.98 C1.1 | 75.32,41.09 C17.1
  Top 0.406: C1.1 75.32,41.09
CS
  Top 0.203: C22.1 85.08,40.83 85.69,40.22 94.42,40.22 R30.1
  Top 0.254: U1.P$8 83.38,40.98 C22.1
ENABLE  (3 unrouted)
  Top 0.254: Q2.1 21.75,10.52 R26.2
FB2
  Top 0.254: U1.P$2 77.19,41.48 76.52,42.15 C1.2 76.31,42.25
  Top 0.406: 76.31,42.25 R27.2 R31.1 R33.2
GND  (via drill 0.36, 0.6)  (29 unrouted)
  Top 0.254: C32.2 v80.86,44.41 | R33.1 v74.26,45.43 | C18.2 v73.37,39.71 | R26.1 23.64,10.52 Q2.2 22.46,13.17 v20.66,13.17 | LED_M2.C 8.34,24.77 v8.34,26.38 8.34,27.39 11.28,30.33 J7.4 | LED_M1.C 24.64,91.53 v26.25,91.78 | LED_M0.C v91.66,73.75 | LED_M3.C v73.75,8.34 | U$11.P$1 2.39,50.41 C41.1 1.27,51.56 v3.01,53.3 3.69,53.98 U$11.P$14 3.69,56.26 3.9,56.48 4.79,56.48 4.99,56.28 U$11.P$12 | C40.1 v8.6,45.94
  other vias: 81.37,38.95 82.38,38.95 81.88,38.32 92.93,58.13 92.04,58.13 91.15,58.13 90.26,58.13 89.37,58.13 88.48,58.13 87.59,58.13 86.7,58.13 85.81,58.13 84.92,58.13 84.04,58.13 83.15,58.13 84.04,48.98 83.15,48.98 82.26,48.98 81.37,48.98 80.48,48.98 79.21,49.37 78.32,49.37 77.43,49.37 76.54,49.37 75.65,49.37 88.48,43.02 88.48,43.9 88.48,42.13 88.48,44.79 88.48,41.24
  pour Top (no thermals): 144.28,73.98 147.49,73.98 147.94,74.43 147.94,76.11 147.49,76.57 145.05,76.57 144.28,75.81
  pour Top (rank 2, no thermals): 20.92,47.46 25.87,47.46 25.87,50 24.35,50 24.35,52.79 27.52,52.79 27.52,49.37 26.63,49.37 26.63,48.35 28.28,48.35 28.41,61.43 28.41,69.56 24.09,73.88 19.9,73.88 20.66,69.56 23.84,64.35 23.71,50 20.92,50
  pour Route2 (no thermals): 108.42,55.08 108.42,43.65 130.01,43.65 130.01,55.08
  pour Top (rank 3, no thermals): 74,61.3 73.88,46.06 84.16,46.06 84.16,40.6 96.1,40.6 96.1,61.3
  pour Top (rank 2, no thermals): 71.84,45.68 71.84,37.3 83.78,37.3 83.78,45.68
  pour Route2 (rank 4): 29.68,100.8 3.01,75.4 29.68,75.4 29.68,43.65 20.79,43.65 9.36,56.35 -0.8,56.35 -0.8,28.41 29.68,-0.8 71.59,-0.8 103.72,30.82 100.8,71.59 71.59,100.8
  pour Route2: 28.41,74.13 28.28,42.38 23.33,42.38 6.82,60.16 6.82,74.13
LED1  (1 unrouted)
LED2  (1 unrouted)
LED3  (1 unrouted)
MISO  (1 unrouted)
MOSI  (1 unrouted)
MOTOR0_PWM_1V8  (2 unrouted)
MOTOR1_PWM_1V8  (2 unrouted)
MOTOR2_PWM_1V8  (2 unrouted)
MOTOR3_PWM_1V8  (2 unrouted)
MOTOR_ENABLE  (5 unrouted)
MOTOR_LOGIC  (2 unrouted)
N$1
  Top 0.254: U$11.P$2 3.04,48.88 2.41,47.88 C37.1
N$2  (1 unrouted)
N$3  (1 unrouted)
N$4
  Top 0.254: R11.1 27.14,46.06 | 27.14,46.06 R12.1 | U2.P$4 25.36,46.06 27.14,46.06
N$5
  Top 0.254: R24.2 85.76,70.79 Q4.D1
  pour Top (no thermals): 84.67,70.95 80.1,70.19 76.67,77.05 85.05,76.92
N$6  (2 unrouted)
N$7  (1 unrouted)
N$8  (2 unrouted)
N$9  (1 unrouted)
N$10  (1 unrouted)
N$11  (via drill 0.6)  (1 unrouted)
  Top 0.254: U2.P$5 v26.38,51.52
N$12  (1 unrouted)
N$13
  Top 0.254: LED_M0.A R24.1
N$14
  Top 0.254: R6.2 29.21,85.76 Q5.D1
  pour Top (no thermals): 29.05,84.67 29.81,80.1 22.95,76.67 23.08,85.05
N$15
  Top 0.254: LED_M1.A R6.1
N$16  (1 unrouted)
N$17  (1 unrouted)
N$18
  Top 0.254: R22.2 14.24,29.21 Q6.D1
  pour Top (no thermals): 15.33,29.05 19.9,29.81 23.33,22.95 14.95,23.08
N$19
  Top 0.254: LED_M2.A R22.1
N$20  (1 unrouted)
N$21  (1 unrouted)
N$22
  Top 0.254: R23.2 70.79,14.24 Q7.D2
  pour Top (no thermals): 70.95,15.33 70.19,19.9 77.05,23.33 76.92,14.95
N$23
  Top 0.254: R23.1 72.26,11.86 LED_M3.A
N$24
  Top 0.406: R27.1 C17.2
N$25  (1 unrouted)
N$26  (1 unrouted)
N$27
  Top 0.254: Q3.G 24.98,15.11 R3.1 23.53,14.09 Q2.3
N$28  (1 unrouted)
  pour Top (rank 3, no thermals): 21.81,50.51 21.81,52.54 19.9,63.59 17.74,63.59 7.71,63.72 7.71,59.65 17.87,50.51
N$29  (via drill 0.36)
  Top 0.406: R4.2 v79.84,38.7 | v98.26,41.74 Q8.P$4
  Route15 0.203: v79.84,38.7 80.99,37.55 94.07,37.55 v98.26,41.74
N$30
  pour Top (rank 2, no thermals): 89.75,52.79 89.75,56.86 100.67,56.86 100.67,52.79
N$31
  Top 0.254: 73.11,43.27 R32.1
  Top 0.406: R31.2 73.11,43.27
N$32
  Top 0.254: U$11.P$4 4.34,47.81 C37.2
  pour Top (no thermals): 32.22,80.48 28.41,76.67 28.41,75.4 29.68,74.13 32.22,74.13 34.76,74.13 34.76,79.21 33.49,80.48
N$33  (1 unrouted)
N$34  (1 unrouted)
N$35
  Top 0.254: U$11.P$5 4.99,46.2 C38.1
N$36
  Top 0.254: U$11.P$6 5.64,46.16 C38.2
N$37
  Top 0.254: U$11.P$3 3.69,48.64 3.26,48.22 3.26,46.63 C39.2
N$38
  Top 0.254: U$11.P$7 6.29,48.06 C40.2
OUT
  Top 0.254: U1.P$5 77.66,39.98 R4.1
PWM_5V_M0  (2 unrouted)
PWM_5V_M1  (2 unrouted)
PWM_5V_M2  (2 unrouted)
PWM_5V_M3  (2 unrouted)
Q3_D
  pour Top (rank 2, no thermals): 89.75,52.29 100.67,52.29 100.67,45.43 89.75,45.43
Q3_S
  pour Top (rank 2, no thermals): 89.75,44.92 98.13,44.92 98.13,40.6 89.75,40.6
RESET  (4 unrouted)
RS-232_RX1  (via drill 0.6)
  Top 0.254: J7.3 10.38,34.76 6.82,34.76 5.55,36.03 v5.55,42.38 | v8.09,49.62 v8.08,49.61 U$11.P$8
  Bottom 0.254: v5.55,42.38 5.55,47.46 v8.09,49.62
RS-232_TX1  (via drill 0.6)
  Top 0.254: J7.2 7.22,36.64 6.82,37.05 v6.82,39.84 | v4.41,51.78 4.34,51.85 U$11.P$13
  Bottom 0.254: v6.82,39.84 4.41,42.25 v4.41,51.78
RT
  Top 0.254: U1.P$9 82.5,41.48 82.77,41.74 82.77,42.74 R34.2
RX1_1V8
  Top 0.203: R25.1 22.79,40.09 59.4,40.09 60.03,39.46 60.03,34.51 59.02,33.49 IC3.P17
  Top 0.254: T1.2 19.26,43.63 R25.1
RX1_5V
  Top 0.254: T1.3 16.68,45 R36.1 14.15,48.73 11.9,48.73 6.94,53.69 U$11.P$9
SCK  (1 unrouted)
SCL_1V8  (2 unrouted)
SCL_5V  (7 unrouted)
SDA_1V8  (2 unrouted)
SDA_5V  (7 unrouted)
SERVO_1  (1 unrouted)
SS2
  Top 0.254: U1.P$10 81.9,41.98 C32.1
TX1_1V8
  Top 0.203: 17.58,39.84 17.62,39.84 17.62,39.59 39.2,39.59 39.59,39.2 39.59,34.38 38.82,33.62 38.32,33.62 IC3.P18
  Top 0.254: T2.2 16.56,40.93 R37.1 17.58,39.84
TX1_5V
  Top 0.254: T2.3 13.99,42.3 R38.1 10.63,44.46 10.63,48.73 5.64,53.72 U$11.P$11
UVLO
  Top 0.254: U1.P$7 82.63,40.48 83.38,39.74 R29.2 R28.1
V_BATT  (via drill 0.36, 0.6)  (5 unrouted)
  Top 0.254: U1.P$1 77.86,43.52 C21.1 | R3.2 26.25,15.11 Q3.S3
  Top 0.406: C21.1 v77.69,44.92 | R28.2 v85.69,38.7
  other vias: 22.31,63.72 22.31,62.45 22.31,61.18 22.31,59.91 22.31,58.64 82.26,55.72 79.59,55.72 83.53,55.72 80.99,55.72 78.32,55.72 77.05,55.72 75.78,55.72 74.51,55.72 88.1,78.19 88.99,77.31 89.88,76.42 29.17,14.95 28.54,15.96 27.9,14.95 10.12,23.58 11.01,22.7 11.9,21.81 12.79,20.92 87.21,79.08 76.29,10.12 77.18,11.01 78.19,11.9 79.08,12.79
  pour Top (no thermals): 74.38,11.65 78.7,7.33 81.88,9.87 81.88,13.42 79.46,15.84 78.58,15.84
  pour Top (no thermals): 89.62,73.11 93.94,77.43 91.4,80.61 87.85,80.61 85.43,78.19 85.43,77.31
  pour Top (no thermals): 26.89,89.62 22.57,93.94 19.39,91.4 19.39,87.85 21.81,85.43 22.7,85.43
  pour Top (no thermals): 11.65,25.62 7.33,21.3 9.87,18.12 13.42,18.12 15.84,20.54 15.84,21.43
  pour Top (no thermals): 23.33,50.63 23.46,64.1 23.2,64.35 20.66,64.35 20.41,64.1 20.54,57.87 22.06,52.67 22.06,50.63
  pour Route15 (no thermals): 107.15,55.08 107.15,41.11 131.28,41.11 131.28,55.08
  pour Top (rank 2, no thermals): 84.54,52.54 74,52.54 74,56.35 84.54,56.35
  pour Route15 (rank 5): 3.01,75.4 29.68,100.8 71.59,100.8 100.8,71.59 103.72,30.82 71.59,-0.8 29.68,-0.8 -0.8,28.41 -0.8,56.35 9.36,56.35 23.33,41.11 29.68,41.11 29.68,75.4
  pour Top (no thermals): 26.12,12.41 29.55,12.41 29.55,14.95 28.41,16.34 26.12,14.82
VCC2
  Top 0.254: U1.P$4 77.02,40.48 C18.1

## Text on the board
tPlace: P-FET
Reference: Front of Vehicle | Battery | ATOM Power | Burn Wires | Serial | USB | Servo